# Altium PCB ExperimentBoard.PcbDoc
Units mil, origin at the board's own origin, x right, y up, seen from the top; angles counter-clockwise.
Board outline 3540 x 3540 mil, 4 copper layers (Top Layer, PWR Layer, GND Layer, Bottom Layer), stack 61.811 mil thick; 31 components, 56 nets, 215 pads, 129 vias.
Unrouted connection lines stored in the file: 9.
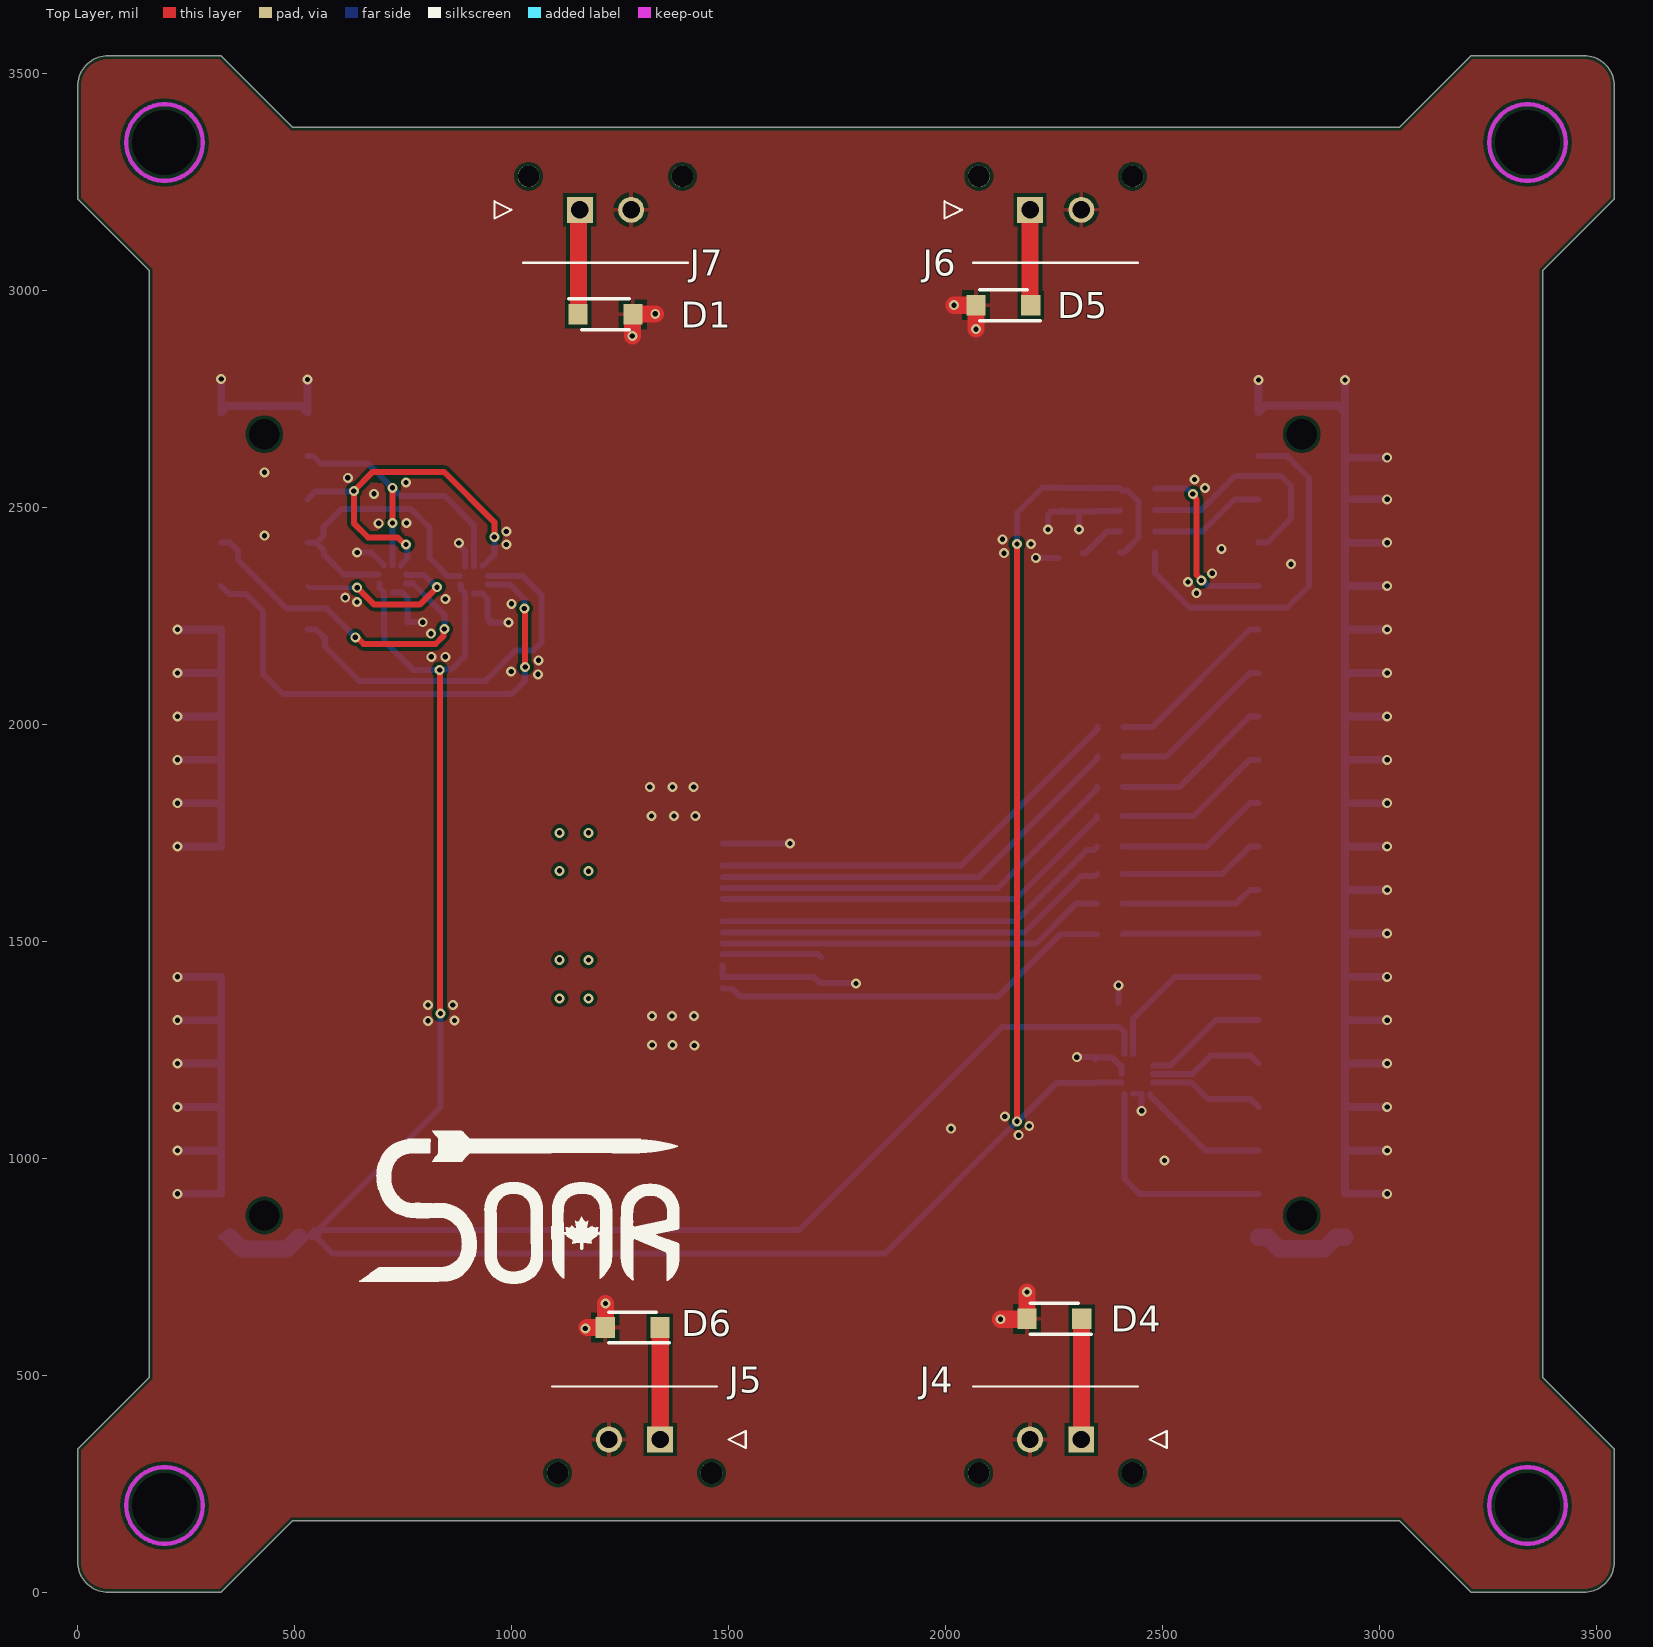
[diagram p0: Top Layer view]
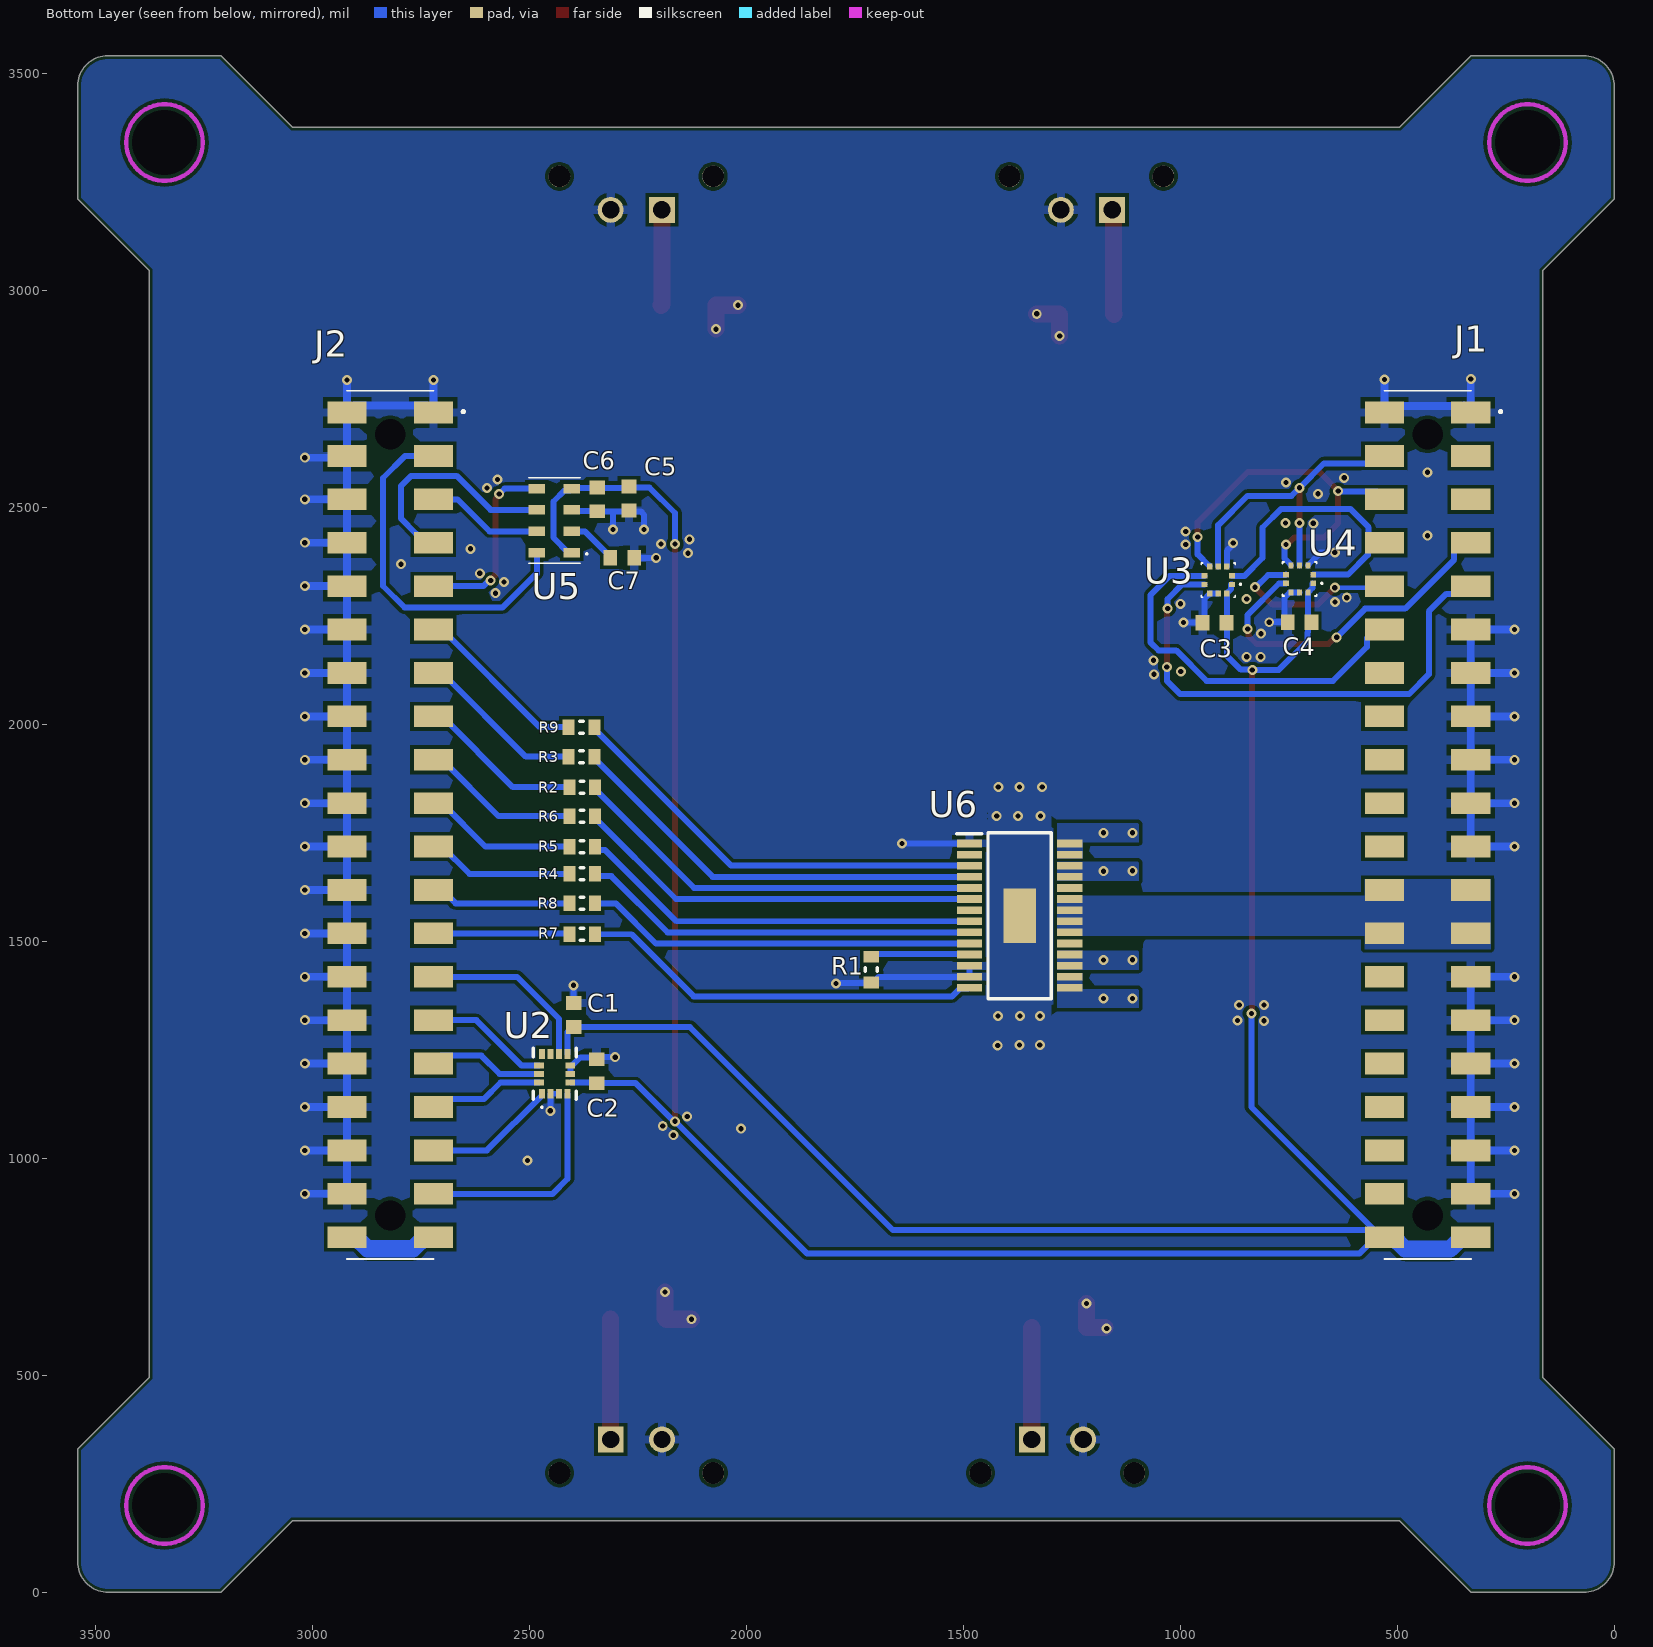
[diagram p1: Bottom Layer view, seen from below]
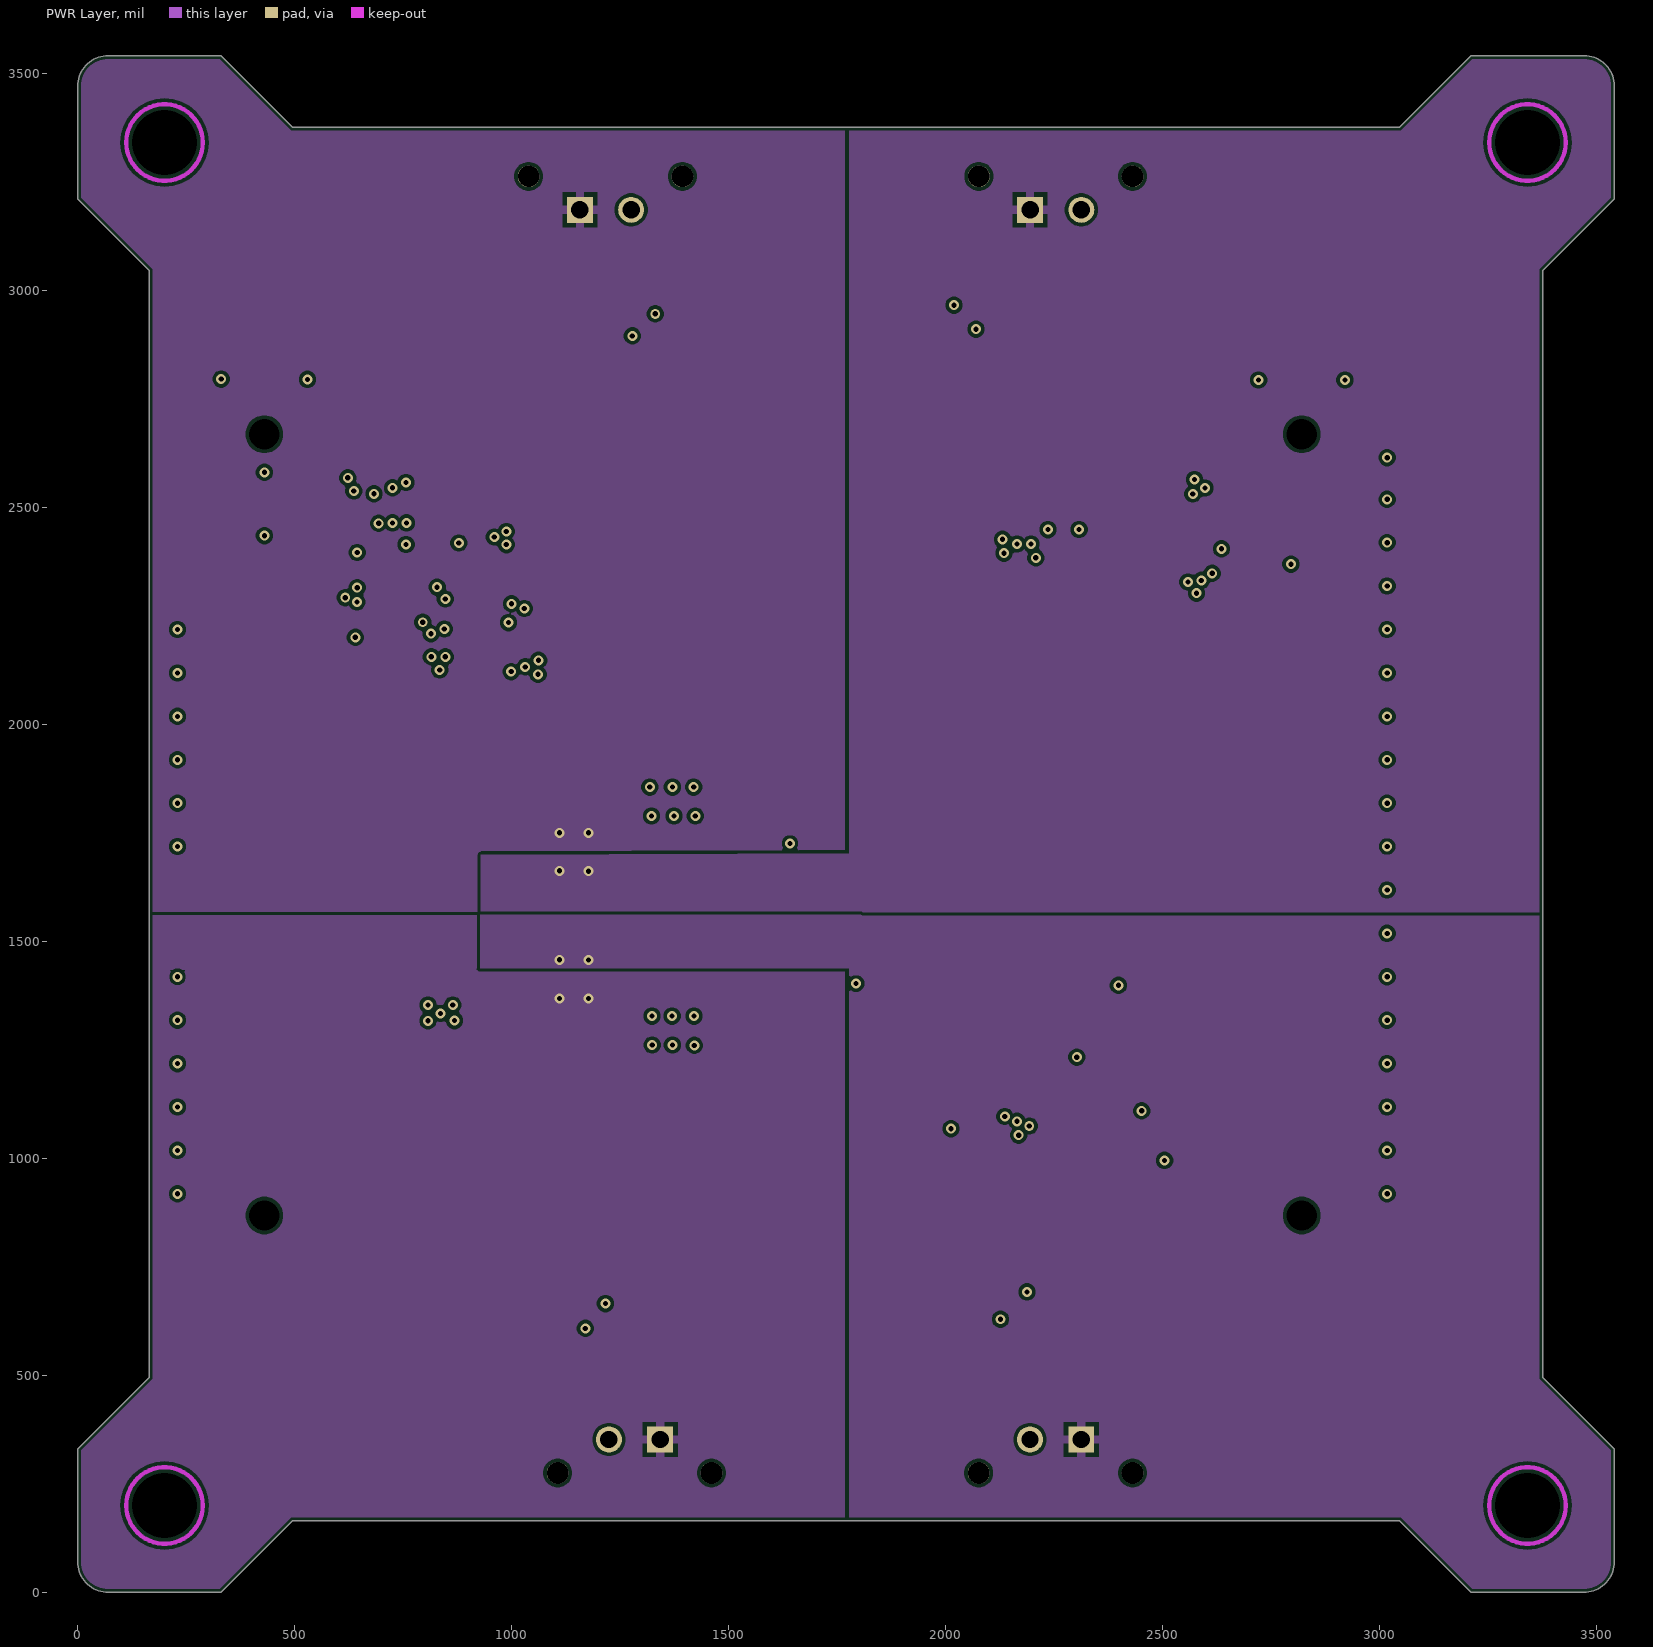
[diagram p2: PWR Layer]
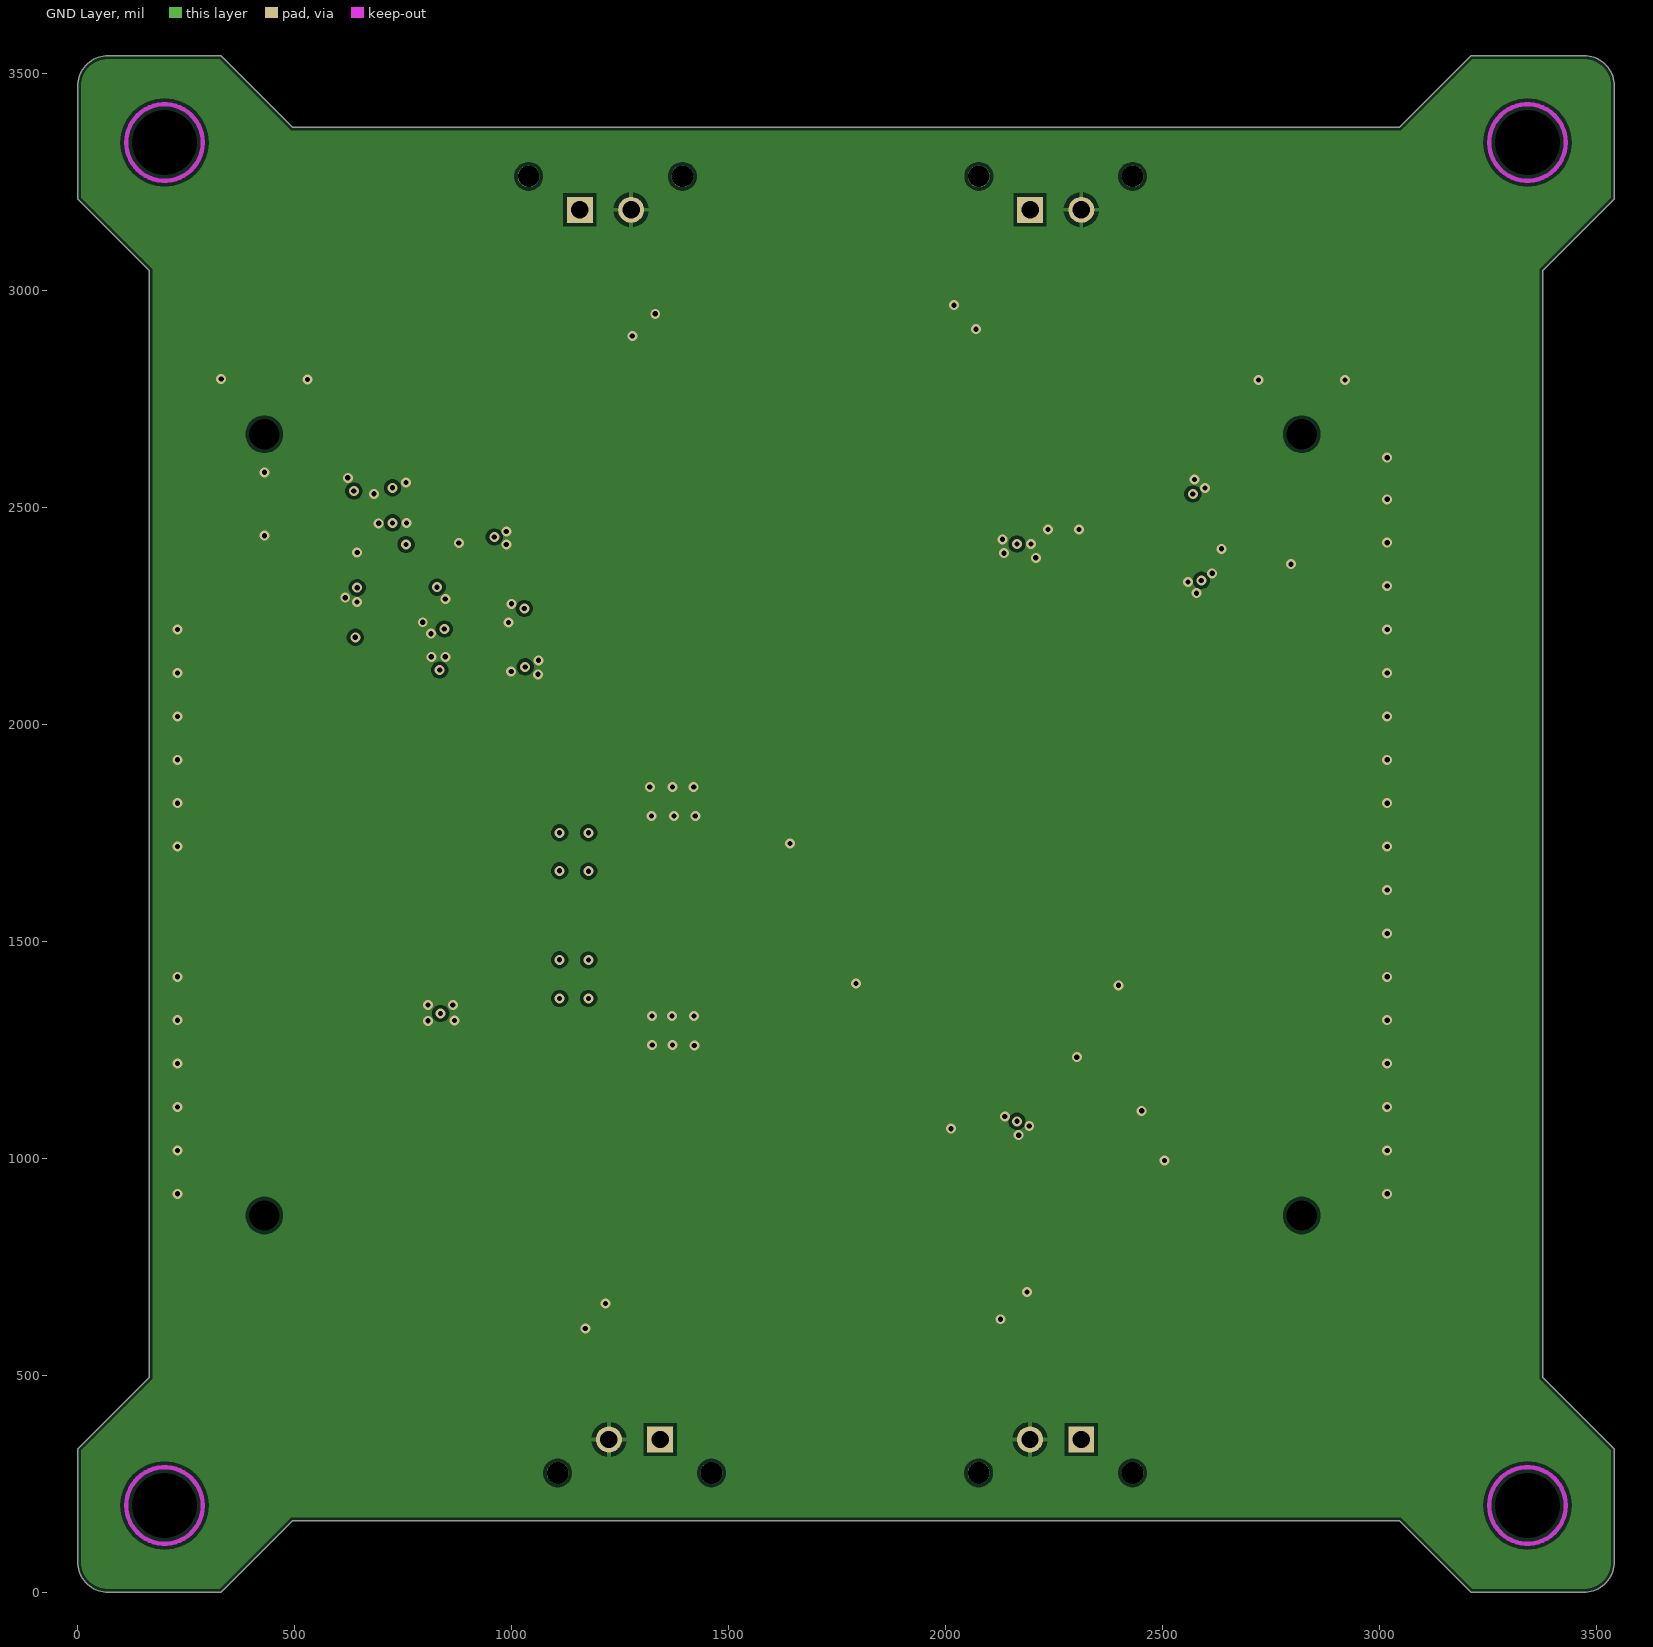
[diagram p3: GND Layer]
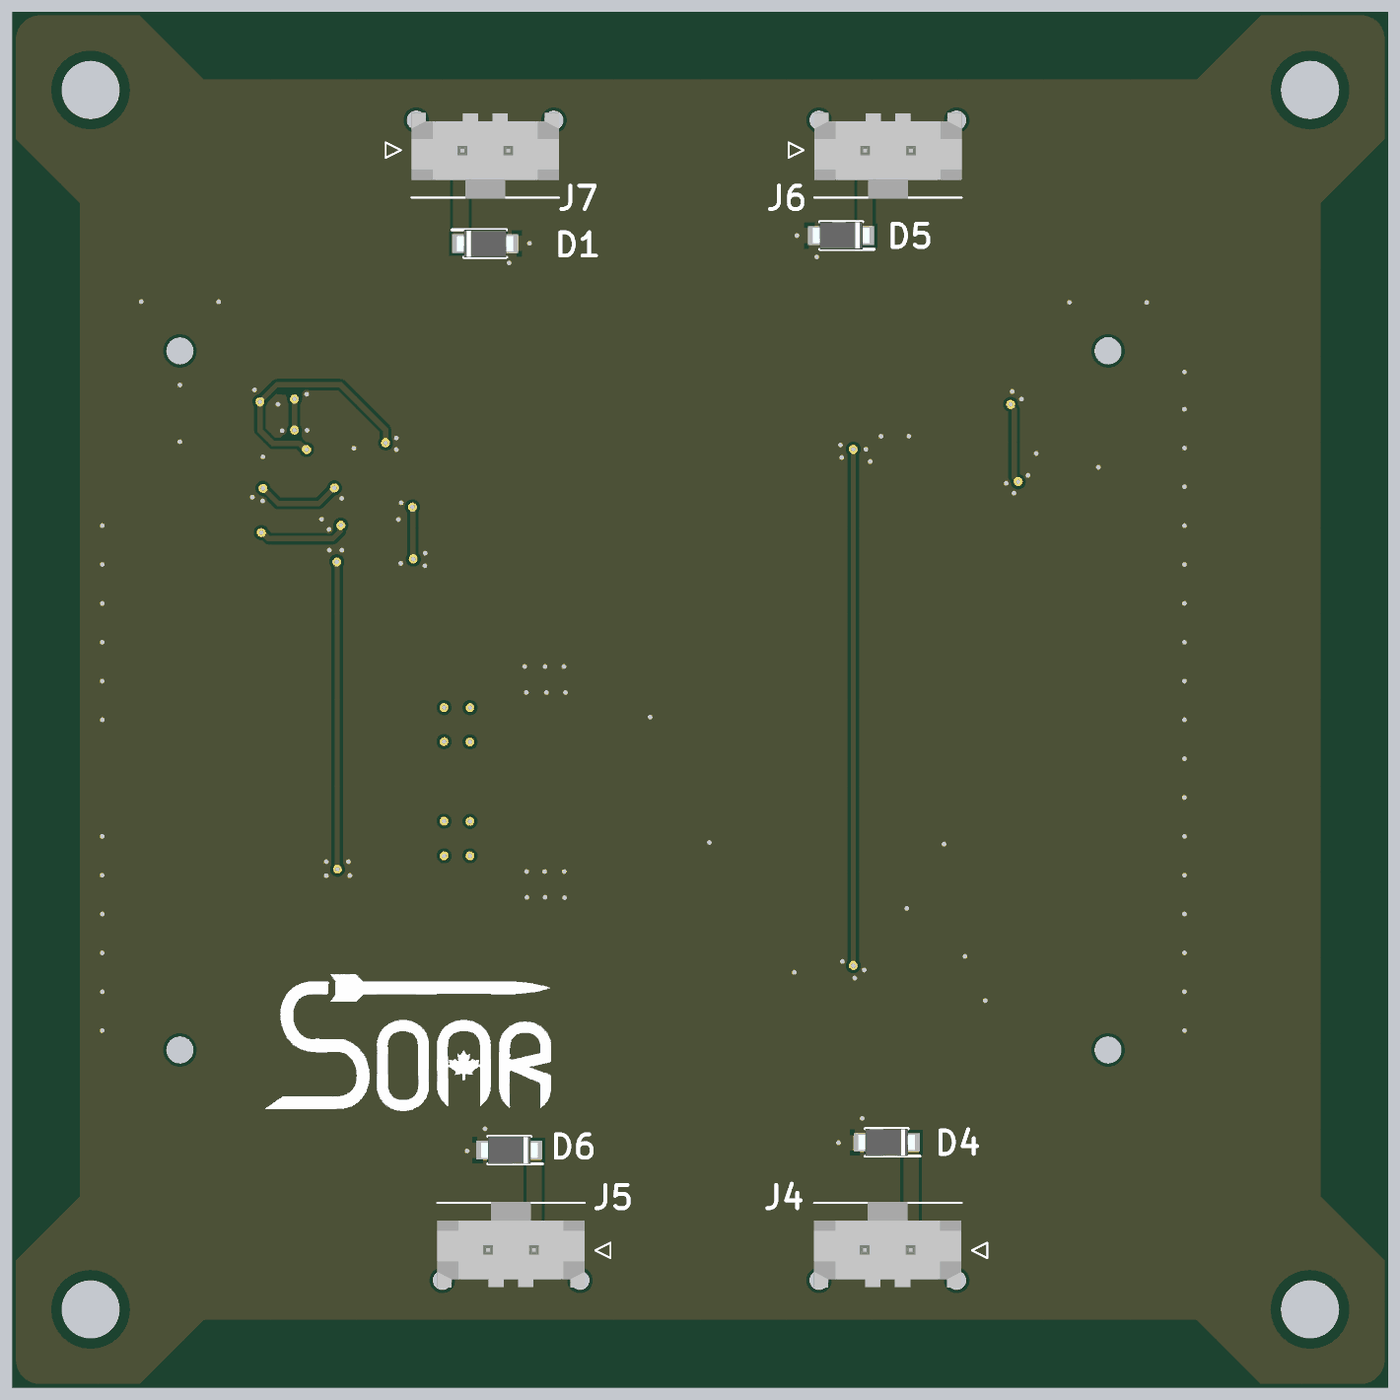
[diagram p4: 3D render of the assembled board from above, using the file's embedded part models]

## Layer stack, top to bottom
Top Mask: solder mask 0.591, Solder Resist, Dk 3.8
Top Layer: signal copper 1.378
Dielectric 1: prepreg 7.874, 7628, Dk 4.6
PWR Layer: signal copper 0.689
Core: core 41.929, FR-4, Dk 4.5
GND Layer: signal copper 0.689
Dielectric 2: prepreg 7.874, 7628, Dk 4.6
Bottom Layer: signal copper 1.378
Bottom Mask: solder mask 0.591, Solder Resist, Dk 3.8

## Board outline
0,3470 cw(c70,3470) 70,3540 330,3540 495,3375 3045,3375 3210,3540 3471,3540 cw(c3471,3471) 3540,3471 3540,3210 3375,3045 3375,495 3540,330 3540,70 cw(c3470,70) 3470,0 3210,0 3045,165 495,165 330,0 70,0 cw(c70,70) 0,70 0,330 165,495 165,3045 0,3210

## Design rules (kind name [scope] priority, off if disabled: settings)
BoardOutlineClearance [All] p1: gap=7.87 ignorepadtopadclearanceinfootprint=FALSE except(15.75: Arc-SplitBarrior Arc-SplitContinuation Track-SplitBarrior Track-SplitContinuation SMDPad-SplitBarrior SMDPad-SplitContinuation THPad-SplitBarrior THPad-SplitContinuation Via-SplitBarrior Via-SplitContinuation Fill-SplitBarrior Fill-SplitContinuation Poly-SplitBarrior Poly-SplitContinuation Region-SplitBarrior Region-SplitContinuation Text-SplitBarrior Text-SplitContinuation)
Clearance [All] p1: gap=7.87 ignorepadtopadclearanceinfootprint=FALSE except(3.5: Arc-Arc Arc-Track Arc-SMDPad Track-Track Track-SMDPad SMDPad-SMDPad; 5: Arc-Via Track-Via SMDPad-Via THPad-Via Via-Via; 10: Arc-Text Track-Text SMDPad-Text THPad-Text Via-Text Fill-Text Poly-Text Region-Text Text-Text)
Clearance "Clearance Bottom Layer" [OnLayer('Bottom Layer')] p2: gap=8 ignorepadtopadclearanceinfootprint=TRUE except(10: Arc-Text Track-Text SMDPad-Text THPad-Text Via-Text Fill-Text Poly-Text Region-Text Text-Text)
Clearance "Clearance Top Layer" [OnLayer('Top Layer')] p3: gap=8 ignorepadtopadclearanceinfootprint=TRUE except(10: Arc-Text Track-Text SMDPad-Text THPad-Text Via-Text Fill-Text Poly-Text Region-Text Text-Text)
HoleSize [All] p1: absolutevalues=TRUE maxlimit=248.03 minlimit=7.87 maxpercent=80.000 minpercent=20.000
MinimumAnnularRing [All] p1: minimumring=3
MinimumSolderMaskSliver [All] p1: minsoldermaskwidth=3.94
PolygonConnect PolygonConnect_21 [All vs IsNamedPolygon('GND')] p1: thpad.connectstyle=Relief thpad.reliefconductorwidth=10 thpad.reliefentries=4 thpad.polygonreliefangle="90 Angle" thpad.airgapwidth=10 smdpad.connectstyle=Relief smdpad.reliefconductorwidth=10 smdpad.reliefentries=4 smdpad.polygonreliefangle="90 Angle" smdpad.airgapwidth=10 via.connectstyle=Direct via.reliefconductorwidth=10 via.reliefentries=4 via.polygonreliefangle="90 Angle" via.airgapwidth=10
PolygonConnect PolygonConnect_20 [All vs IsNamedPolygon('GND_L01_P052')] p2: thpad.connectstyle=Relief thpad.reliefconductorwidth=10 thpad.reliefentries=4 thpad.polygonreliefangle="90 Angle" thpad.airgapwidth=10 smdpad.connectstyle=Relief smdpad.reliefconductorwidth=10 smdpad.reliefentries=4 smdpad.polygonreliefangle="90 Angle" smdpad.airgapwidth=10 via.connectstyle=Direct via.reliefconductorwidth=10 via.reliefentries=4 via.polygonreliefangle="90 Angle" via.airgapwidth=10
PolygonConnect PolygonConnect_19 [All vs IsNamedPolygon('OUT1_L04_P049')] p3: connectstyle=Direct reliefconductorwidth=10 reliefentries=4 polygonreliefangle="90 Angle" airgapwidth=10
PolygonConnect PolygonConnect_18 [All vs IsNamedPolygon('OUT4_L04_P048')] p4: connectstyle=Direct reliefconductorwidth=10 reliefentries=4 polygonreliefangle="90 Angle" airgapwidth=10
PolygonConnect PolygonConnect_17 [All vs IsNamedPolygon('OUT3_L04_P047')] p5: connectstyle=Direct reliefconductorwidth=10 reliefentries=4 polygonreliefangle="90 Angle" airgapwidth=10
PolygonConnect PolygonConnect_16 [All vs IsNamedPolygon('OUT2_L04_P046')] p6: connectstyle=Direct reliefconductorwidth=10 reliefentries=4 polygonreliefangle="90 Angle" airgapwidth=10
PolygonConnect PolygonConnect_15 [All vs IsNamedPolygon('GND_L04_P040')] p7: thpad.connectstyle=Relief thpad.reliefconductorwidth=10 thpad.reliefentries=4 thpad.polygonreliefangle="90 Angle" thpad.airgapwidth=10 smdpad.connectstyle=Direct smdpad.reliefconductorwidth=10 smdpad.reliefentries=4 smdpad.polygonreliefangle="90 Angle" smdpad.airgapwidth=10 via.connectstyle=Direct via.reliefconductorwidth=10 via.reliefentries=4 via.polygonreliefangle="90 Angle" via.airgapwidth=10
PolygonConnect PolygonConnect_14 [All vs IsNamedPolygon('GND_L04_P040')] p8: thpad.connectstyle=Relief thpad.reliefconductorwidth=10 thpad.reliefentries=4 thpad.polygonreliefangle="90 Angle" thpad.airgapwidth=10 smdpad.connectstyle=Direct smdpad.reliefconductorwidth=10 smdpad.reliefentries=4 smdpad.polygonreliefangle="90 Angle" smdpad.airgapwidth=10 via.connectstyle=Relief via.reliefconductorwidth=10 via.reliefentries=4 via.polygonreliefangle="90 Angle" via.airgapwidth=10
PolygonConnect PolygonConnect_13 [All vs IsNamedPolygon('OUT4_L04_P044')] p9: thpad.connectstyle=Relief thpad.reliefconductorwidth=10 thpad.reliefentries=4 thpad.polygonreliefangle="90 Angle" thpad.airgapwidth=10 smdpad.connectstyle=Direct smdpad.reliefconductorwidth=10 smdpad.reliefentries=4 smdpad.polygonreliefangle="90 Angle" smdpad.airgapwidth=10 via.connectstyle=Relief via.reliefconductorwidth=10 via.reliefentries=4 via.polygonreliefangle="90 Angle" via.airgapwidth=10
PolygonConnect PolygonConnect_12 [All vs IsNamedPolygon('OUT3_L04_P043')] p10: thpad.connectstyle=Relief thpad.reliefconductorwidth=10 thpad.reliefentries=4 thpad.polygonreliefangle="90 Angle" thpad.airgapwidth=10 smdpad.connectstyle=Direct smdpad.reliefconductorwidth=10 smdpad.reliefentries=4 smdpad.polygonreliefangle="90 Angle" smdpad.airgapwidth=10 via.connectstyle=Relief via.reliefconductorwidth=10 via.reliefentries=4 via.polygonreliefangle="90 Angle" via.airgapwidth=10
PolygonConnect PolygonConnect_11 [All vs IsNamedPolygon('OUT2_L04_P042')] p11: thpad.connectstyle=Relief thpad.reliefconductorwidth=10 thpad.reliefentries=4 thpad.polygonreliefangle="90 Angle" thpad.airgapwidth=10 smdpad.connectstyle=Direct smdpad.reliefconductorwidth=10 smdpad.reliefentries=4 smdpad.polygonreliefangle="90 Angle" smdpad.airgapwidth=10 via.connectstyle=Relief via.reliefconductorwidth=10 via.reliefentries=4 via.polygonreliefangle="90 Angle" via.airgapwidth=10
PolygonConnect PolygonConnect_10 [All vs IsNamedPolygon('OUT2_L04_P042')] p12: thpad.connectstyle=Relief thpad.reliefconductorwidth=10 thpad.reliefentries=4 thpad.polygonreliefangle="90 Angle" thpad.airgapwidth=10 smdpad.connectstyle=Direct smdpad.reliefconductorwidth=10 smdpad.reliefentries=4 smdpad.polygonreliefangle="90 Angle" smdpad.airgapwidth=10 via.connectstyle=Relief via.reliefconductorwidth=10 via.reliefentries=4 via.polygonreliefangle="90 Angle" via.airgapwidth=10
PolygonConnect PolygonConnect_9 [All vs IsNamedPolygon('OUT1_L04_P041')] p13: thpad.connectstyle=Relief thpad.reliefconductorwidth=10 thpad.reliefentries=4 thpad.polygonreliefangle="90 Angle" thpad.airgapwidth=10 smdpad.connectstyle=Direct smdpad.reliefconductorwidth=10 smdpad.reliefentries=4 smdpad.polygonreliefangle="90 Angle" smdpad.airgapwidth=10 via.connectstyle=Relief via.reliefconductorwidth=10 via.reliefentries=4 via.polygonreliefangle="90 Angle" via.airgapwidth=10
PolygonConnect PolygonConnect_8 [All vs IsNamedPolygon('GND_L04_P040')] p14: thpad.connectstyle=Relief thpad.reliefconductorwidth=10 thpad.reliefentries=4 thpad.polygonreliefangle="90 Angle" thpad.airgapwidth=10 smdpad.connectstyle=Direct smdpad.reliefconductorwidth=10 smdpad.reliefentries=4 smdpad.polygonreliefangle="90 Angle" smdpad.airgapwidth=10 via.connectstyle=Direct via.reliefconductorwidth=10 via.reliefentries=4 via.polygonreliefangle="90 Angle" via.airgapwidth=10
PolygonConnect PolygonConnect_7 [All vs IsNamedPolygon('GND_L04_P040')] p15: thpad.connectstyle=Relief thpad.reliefconductorwidth=10 thpad.reliefentries=4 thpad.polygonreliefangle="90 Angle" thpad.airgapwidth=10 smdpad.connectstyle=Relief smdpad.reliefconductorwidth=10 smdpad.reliefentries=4 smdpad.polygonreliefangle="90 Angle" smdpad.airgapwidth=10 via.connectstyle=Direct via.reliefconductorwidth=10 via.reliefentries=4 via.polygonreliefangle="90 Angle" via.airgapwidth=10
PolygonConnect PolygonConnect_6 [All vs IsNamedPolygon('GND_L04_P040')] p16: thpad.connectstyle=Direct thpad.reliefconductorwidth=10 thpad.reliefentries=4 thpad.polygonreliefangle="90 Angle" thpad.airgapwidth=10 smdpad.connectstyle=Direct smdpad.reliefconductorwidth=10 smdpad.reliefentries=4 smdpad.polygonreliefangle="90 Angle" smdpad.airgapwidth=10 via.connectstyle=Relief via.reliefconductorwidth=10 via.reliefentries=4 via.polygonreliefangle="90 Angle" via.airgapwidth=10
PolygonConnect PolygonConnect_5 [All vs IsNamedPolygon('GND')] p17: thpad.connectstyle=Direct thpad.reliefconductorwidth=10 thpad.reliefentries=4 thpad.polygonreliefangle="90 Angle" thpad.airgapwidth=10 smdpad.connectstyle=Direct smdpad.reliefconductorwidth=10 smdpad.reliefentries=4 smdpad.polygonreliefangle="90 Angle" smdpad.airgapwidth=10 via.connectstyle=Relief via.reliefconductorwidth=10 via.reliefentries=4 via.polygonreliefangle="90 Angle" via.airgapwidth=10
PolygonConnect PolygonConnect_4 [All vs IsNamedPolygon('GND')] p18: thpad.connectstyle=Direct thpad.reliefconductorwidth=10 thpad.reliefentries=4 thpad.polygonreliefangle="90 Angle" thpad.airgapwidth=10 smdpad.connectstyle=Direct smdpad.reliefconductorwidth=10 smdpad.reliefentries=4 smdpad.polygonreliefangle="90 Angle" smdpad.airgapwidth=10 via.connectstyle=Relief via.reliefconductorwidth=10 via.reliefentries=4 via.polygonreliefangle="90 Angle" via.airgapwidth=10
PolygonConnect PolygonConnect_3 [All vs IsNamedPolygon('12V1_L04_P039')] p19: thpad.connectstyle=Direct thpad.reliefconductorwidth=10 thpad.reliefentries=4 thpad.polygonreliefangle="90 Angle" thpad.airgapwidth=10 smdpad.connectstyle=Direct smdpad.reliefconductorwidth=10 smdpad.reliefentries=4 smdpad.polygonreliefangle="90 Angle" smdpad.airgapwidth=10 via.connectstyle=Relief via.reliefconductorwidth=10 via.reliefentries=4 via.polygonreliefangle="90 Angle" via.airgapwidth=10
PolygonConnect PolygonConnect_2 [All vs IsNamedPolygon('NONET_L04_P039')] p20: thpad.connectstyle=Relief thpad.reliefconductorwidth=10 thpad.reliefentries=4 thpad.polygonreliefangle="90 Angle" thpad.airgapwidth=10 smdpad.connectstyle=Direct smdpad.reliefconductorwidth=10 smdpad.reliefentries=4 smdpad.polygonreliefangle="90 Angle" smdpad.airgapwidth=10 via.connectstyle=Relief via.reliefconductorwidth=10 via.reliefentries=4 via.polygonreliefangle="90 Angle" via.airgapwidth=10
PolygonConnect [All vs IsNamedPolygon('NONET_L04_P034')] p21: thpad.connectstyle=Relief thpad.reliefconductorwidth=10 thpad.reliefentries=4 thpad.polygonreliefangle="90 Angle" thpad.airgapwidth=10 smdpad.connectstyle=Direct smdpad.reliefconductorwidth=10 smdpad.reliefentries=4 smdpad.polygonreliefangle="90 Angle" smdpad.airgapwidth=10 via.connectstyle=Relief via.reliefconductorwidth=10 via.reliefentries=4 via.polygonreliefangle="90 Angle" via.airgapwidth=10
PolygonConnect PolygonConnect_1 [All] p22: thpad.connectstyle=Relief thpad.reliefconductorwidth=20 thpad.reliefentries=4 thpad.polygonreliefangle="90 Angle" thpad.airgapwidth=10 smdpad.connectstyle=Relief smdpad.reliefconductorwidth=20 smdpad.reliefentries=4 smdpad.polygonreliefangle="90 Angle" smdpad.airgapwidth=10 via.connectstyle=Relief via.reliefconductorwidth=10 via.reliefentries=4 via.polygonreliefangle="90 Angle" via.airgapwidth=10
RoutingCorners [All] p1: cornerstyle=Round minsetback=100 maxsetback=100
RoutingVias [All] p1: holewidth=19.68 width=39.37 viastyle="Through Hole" minholewidth=7.87 minwidth=17.72 maxholewidth=39.37 maxwidth=78.74
SilkToSilkClearance [All] p1: silktosilkclearance=3.94
SilkToSolderMaskClearance [IsPad] p1: minsilkscreentomaskgap=3.94 clearancetoexposedcopper=TRUE
SolderMaskExpansion [IsVia And InNetClass('GND_Class')] p1: expansion=0 istentingtop=TRUE
SolderMaskExpansion SolderMaskExpansionGlobal [All] p2: expansion=0.9 istentingtop=FALSE
SupplyNets "Schematic Supply Nets_4" [InNet('5V')] p1: voltage=0.000
SupplyNets "Schematic Supply Nets_3" [InNet('GND')] p2: voltage=0.000
SupplyNets "Schematic Supply Nets_2" [InNet('12V1')] p3: voltage=0.000
SupplyNets "Schematic Supply Nets_1" [InNet('3V3')] p4: voltage=0.000
Width [All] p1: maxlimit=100 minlimit=3.5 preferedwidth=10 minimp=50.000000 maximp=50.000000 favimp=50.000000
25 further rules are at their usual default settings.

## Classes and differential pairs
net class GND_Class: GND
polygon class Top_GND: GND

## Components (designator, comment, footprint, x,y, rotation, side; value= is the part's Value field where it differs from the comment)
C1 "0.1uF" 1608[0603] 2397.56,1330 r270 bottom
C2 "0.1uF" 1608[0603] 2344.25,1200.36 r270 bottom
C3 "0.1uF" 1608[0603] 921,2234 r180 bottom
C4 "0.1uF" 1608[0603] 725.02,2234.81 r180 bottom
C5 "0.1uF" 1608[0603] 2270,2520 r270 bottom
C6 "10uF" 1608[0603] 2342.91,2517.83 r270 bottom value=0.1uF
C7 "0.1uF" 1608[0603] 2285.2,2383.22 r180 bottom
D1 "SL1J" SODFL3718X130N 1215.87,2944.35 r0 top
D4 "SL1J" SODFL3718X130N 2250,630 r180 top
D5 "SL1J" SODFL3718X130N 2132.7,2965.18 r180 top
D6 "SL1J" SODFL3718X130N 1278.36,610 r180 top
J1 "HLE-120-02-L-DV-A" HLE-120-02-XXX-DV-A 430,1768 r90 bottom
J2 "HLE-120-02-L-DV-A" HLE-120-02-XXX-DV-A 2820,1768 r90 bottom
J4 "43650-0216" 43650-02YY_151617 2312,352 r0 top
J5 "43650-0216" 43650-02YY_151617 1342,352 r0 top
J6 "43650-0216" 43650-02YY_151617 2194,3185 r180 top
J7 "43650-0216" 43650-02YY_151617 1156.89,3185 r180 top (schematic designator J9)
R1 "800" J1-0603 1711.89,1434.59 r270 bottom value=1K
R2 "4.7k" J1-0603 2378,1855 r0 bottom value=1K
R3 "4.7k" J1-0603 2379.47,1925 r0 bottom value=1K
R4 "4.7k" J1-0603 2378,1655 r0 bottom value=1K
R5 "4.7k" J1-0603 2378,1718 r0 bottom value=1K
R6 "4.7k" J1-0603 2378,1788 r0 bottom value=1K
R7 "4.7k" J1-0603 2378,1516 r0 bottom value=1K
R8 "4.7k" J1-0603 2378,1587 r0 bottom value=1K
R9 "4.7k" J1-0603 2379.47,1993 r0 bottom value=1K
U2 "LSM6DSO32TR" LSM6DSO 2441.06,1194.32 r90 bottom
U3 "LPS22HHTR" LPS22HHTR 912.41,2332.03 r0 bottom
U4 "LPS22HHTR" LPS22HHTR 725.02,2334.42 r0 bottom
U5 "MPL3115A2ST1" MPL3115A2R1 2442,2469 r0 bottom
U6 "TPS4H160AQPWPRQ1" SOP65P640X120-28N 1370,1558.75 r180 bottom

## Footprints (in the part's own frame and the unit in brackets; to place one, negate y for a bottom-side part, rotate by r counter-clockwise, add the part's x,y. Pads: shape width x height; smd on the part's side, far side on the other; paste and mask are expansions set on the pad)
1608[0603] [mm]
  rect 0.8x0.9 smd: 1(-0.7,0) 2(0.7,0)
  body extent -0.87,-0.48 0.87,0.48, height 1.3
43650-02YY_151617 [mm]
  rect 1.52x1.52 hole 1.02: 1(0,0)
  round 1.52 hole 1.02: 2(-3,0)
  round 1.27 hole 1.27 unplated: 3(3,-1.96) 4(-6,-1.96)
  silkscreen extent -6.32,-0.5 5,3.1, body extent -6.33,-2.44 3.31,3.17, height 9.77
HLE-120-02-XXX-DV-A [mm]
  rect 1.27x2.29 smd: 1(24.13,-2.525) 2(24.13,2.525) 3(21.59,-2.525) 4(21.59,2.525) 5(19.05,-2.525) 6(19.05,2.525) 7(16.51,-2.525) 8(16.51,2.525) 9(13.97,-2.525) 10(13.97,2.525) 11(11.43,-2.525) 12(11.43,2.525) 13(8.89,-2.525) 14(8.89,2.525) 15(6.35,-2.525) 16(6.35,2.525) 17(3.81,-2.525) 18(3.81,2.525) 19(1.27,-2.525) 20(1.27,2.525) 21(-1.27,-2.525) 22(-1.27,2.525) 23(-3.81,-2.525) 24(-3.81,2.525) 25(-6.35,-2.525) 26(-6.35,2.525) 27(-8.89,-2.525) 28(-8.89,2.525) 29(-11.43,-2.525) 30(-11.43,2.525) 31(-13.97,-2.525) 32(-13.97,2.525) 33(-16.51,-2.525) 34(-16.51,2.525) 35(-19.05,-2.525) 36(-19.05,2.525) 37(-21.59,-2.525) 38(-21.59,2.525) 39(-24.13,-2.525) 40(-24.13,2.525)
  round 0.89 hole 1.78 unplated: 41(22.86,0) 42(-22.86,0)
  silkscreen extent -25.4,-4.32 25.4,2.54
J1-0603 [mm] "Chip Resistor, Body 1.6x0.8mm, IPC High Density"
  rect 0.7x0.9 smd: 1(-0.75,0) 2(0.75,0)
  silkscreen extent -0.1,-0.35 0.1,0.35, body extent -0.85,-0.48 0.85,0.48, height 0.9
LPS22HHTR [mm]
  rect 0.35x0.3 smd: 1(-0.8,0.25) 2(-0.8,-0.25) 6(0.8,-0.25) 7(0.8,0.25)
  rect 0.3x0.35 smd: 3(-0.5,-0.8) 4(0,-0.8) 5(0.5,-0.8) 8(0.5,0.8) 9(0,0.8) 10(-0.5,0.8)
  silkscreen extent -1.35,-1 1,1, body extent -1,-1 1,1, height 0.8
LSM6DSO [mm]
  rect 0.575x0.35 smd: 1(-1.163,0.75) 2(-1.163,0.25) 3(-1.163,-0.25) 4(-1.163,-0.75) 8(1.163,-0.75) 9(1.163,-0.25) 10(1.163,0.25) 11(1.163,0.75)
  rect 0.35x0.575 smd: 5(-0.5,-0.913) 6(0,-0.913) 7(0.5,-0.913) 12(0.5,0.913) 13(0,0.913) 14(-0.5,0.913)
  silkscreen extent -2,-1.25 1.5,1.25, body extent -1.55,-1.3 1.55,1.3, height 0.87
MPL3115A2R1 [mm]
  rect 0.95x0.55 smd: 1(-1.025,1.875) 2(-1.025,0.625) 3(-1.025,-0.625) 4(-1.025,-1.875) 5(1.025,-1.875) 6(1.025,-0.625) 7(1.025,0.625) 8(1.025,1.875)
  silkscreen extent -1.95,-2.5 1.5,2.5, body extent -1.5,-2.5 1.5,2.5, height 1.3
SODFL3718X130N [mm]
  rect 1.12x1.22 smd: 1(-1.6,0) 2(1.6,0)
  silkscreen extent -2.16,-0.9 1.4,0.9, body extent -1.85,-0.9 1.85,0.9, height 1.3
SOP65P640X120-28N [mm]
  rect 1.475x0.45 smd: 1(-2.938,4.225) 2(-2.938,3.575) 3(-2.938,2.925) 4(-2.938,2.275) 5(-2.938,1.625) 6(-2.938,0.975) 7(-2.938,0.325) 8(-2.938,-0.325) 9(-2.938,-0.975) 10(-2.938,-1.625) 11(-2.938,-2.275) 12(-2.938,-2.925) 13(-2.938,-3.575) 14(-2.938,-4.225) 15(2.938,-4.225) 16(2.938,-3.575) 17(2.938,-2.925) 18(2.938,-2.275) 19(2.938,-1.625) 20(2.938,-0.975) 21(2.938,-0.325) 22(2.938,0.325) 23(2.938,0.975) 24(2.938,1.625) 25(2.938,2.275) 26(2.938,2.925) 27(2.938,3.575) 28(2.938,4.225)
  rect 1.9x3.2 smd: 29(0,0)
  silkscreen extent -3.67,-4.85 1.85,4.85, body extent -3.2,-4.85 3.2,4.85, height 1.13

## Part data
C1 C2 C3 C4 C5 C6 C7: library part Cap, "Capacitor", Published=8-Jun-2000, PackageReference=RAD-0.3, PackageDescription="Radial Cap, Thru-Hole; 2 Leads; 0.3 in Pin Spacing", LatestRevisionDate=17-Jul-2002, Publisher="Altium Limited", LatestRevisionNote="Re-released for DXP Platform."
D1 D4 D5 D6: "Diode", Manufacturer_Name=Diotec, Mouser Part Number=637-SL1J, Manufacturer_Part_Number=SL1J, Height=1.3mm, Datasheet Link=https://diotec.com/request/datasheet/sl1a.pdf, Mouser Price/Stock=https://www.mouser.co.uk/ProductDetail/Diotec-Semiconductor/SL1J?qs=OlC7AqGiEDm%2FUyNJqMVviA%3D%3D, Arrow Part Number=SL1J, Arrow Price/Stock=https://www.arrow.com/en/products/sl1j/diotec-semiconductor-ag?region=europe
J1 J2: "Connector", Manufacturer_Name=SAMTEC, Mouser Part Number=200-HLE12002LDVA, Arrow Part Number=HLE-120-02-L-DV-A, Arrow Price/Stock=https://www.arrow.com/en/products/hle-120-02-l-dv-a/samtec?region=nac, Datasheet Link=http://suddendocs.samtec.com/prints/hle-1xx-02-xxx-dv-xx-xx-xx-mkt.pdf, Manufacturer_Part_Number=HLE-120-02-L-DV-A, Mouser Price/Stock=https://www.mouser.co.uk/ProductDetail/Samtec/HLE-120-02-L-DV-A?qs=0lQeLiL1qyZq0rwGrAI%2FeQ%3D%3D
J4 J5 J6 J7: "Connector", Manufacturer_Name=Molex, Mouser Part Number=538-43650-0216, Datasheet Link=https://www.molex.com/pdm_docs/sd/436500215_sd.pdf, Height=9.9mm, Manufacturer_Part_Number=43650-0216, Mouser Price/Stock=https://www.mouser.co.uk/ProductDetail/Molex/43650-0216?qs=EeaHXY5iaaOSmxGRwEX9Ng%3D%3D
R1 R2 R3 R4 R5 R6 R7 R8 R9: library part Res3, "Resistor", LatestRevisionDate=29-May-2009, LatestRevisionNote="IPC-7351 Footprint Added.", PackageDescription="Chip Resistor", PackageReference=J1-0603, Published=8-Jun-2000, Publisher="Altium Limited"
U2: library part LSM6DSO, "Accelerometer", Manufacturer_Name=STMicroelectronics, Mouser Part Number=N/A, Datasheet Link=https://www.st.com/en/mems-and-sensors/lsm6dso.html, Height=0.86mm, Manufacturer_Part_Number=LSM6DSO, Mouser Price/Stock=https://www.mouser.co.uk/ProductDetail/STMicroelectronics/LSM6DSO?qs=lc2O%252BfHJPVaWmEJZZeO%252B0w%3D%3D
U3 U4: "Integrated Circuit", Manufacturer_Name=STMicroelectronics, Mouser Part Number=511-LPS22HHTR, Arrow Part Number=LPS22HHTR, Arrow Price/Stock=https://www.arrow.com/en/products/lps22hhtr/stmicroelectronics?region=europe, Datasheet Link=https://www.st.com/resource/en/datasheet/lps22hh.pdf, Height=0.8mm, Manufacturer_Part_Number=LPS22HHTR, Mouser Price/Stock=https://www.mouser.co.uk/ProductDetail/STMicroelectronics/LPS22HHTR?qs=lc2O%252BfHJPVbKAkJQGWFcLg%3D%3D
U5: library part MPL3115A2R1, "Integrated Circuit", Manufacturer_Name=NXP, Mouser Part Number=841-MPL3115A2R1, Arrow Part Number=MPL3115A2R1, Arrow Price/Stock=https://www.arrow.com/en/products/mpl3115a2r1/nxp-semiconductors?region=nac, Datasheet Link=http://www.nxp.com/docs/en/data-sheet/MPL3115A2.pdf, Height=1.2mm, Manufacturer_Part_Number=MPL3115A2R1, Mouser Price/Stock=https://www.mouser.co.uk/ProductDetail/NXP-Semiconductors/MPL3115A2R1?qs=6ddF3R%2F6EV%2Fx8daKoNGetQ%3D%3D
U6: "Switch", Manufacturer_Name="Texas Instruments", Mouser Part Number=595-TPS4H160AQPWPRQ1, Arrow Part Number=TPS4H160AQPWPRQ1, Arrow Price/Stock=https://www.arrow.com/en/products/tps4h160aqpwprq1/texas-instruments?region=nac, Datasheet Link=http://www.ti.com/lit/gpn/tps4h160-q1, Height=1.2mm, Manufacturer_Part_Number=TPS4H160AQPWPRQ1, Mouser Price/Stock=https://www.mouser.co.uk/ProductDetail/Texas-Instruments/TPS4H160AQPWPRQ1?qs=l4JqiU1WKg3jmTHCrG9xTw%3D%3D

## Free pads (board coordinates)
  round 60 hole 150 unplated mask+10: 2(200,200) 2(200,3340) 2(3340,200) 2(3340,3340)

## Via types
v1: diameter 23, hole 12, Top Layer to Bottom Layer, tented both sides, 104 vias
v2: diameter 23, hole 12, Top Layer to Bottom Layer, 25 vias

## Nets (pads, with @x,y where several pads share a name; then routed paths per layer and width w, separated by ;. In a path a pad name is that pad's centre, name@x,y a point inside that pad or via, vN(x,y) a via of type N, cw(c..) or ccw(c..) an arc to the next point about the centre after c; other vN are vias at no path point)
3V3: C1.2 C2.2 C3.2 C4.2 C5.1 C6.1 J1.39 J1.40 U2.5 U2.8 U3.1 U3.10 U4.1 U4.10 U5.1 U5.4 | length 8215.9
  Top Layer w10: v2(834,2125) v2@835,2124 ; v2@835,1334.45 v2(836,1333.45)
  Top Layer w13.78: v2@835,1334.45 v2@835,2124 ; v2(2164,1085) 2164,2364.52 v2(2164,2415)
  Bottom Layer w13.78: J1.39 J1.39@350.67,818 ; J1.40@509.33,818 J1.40 ; J1.40@529.61,818 J1.40@545.89,834.28 ; J1.40@536.02,818 J1.40@549.49,818 ; J1.40@545.79,834.38 1661.59,834.38 2129.65,1302.44 C1.2 2399.53,1302.44 2411.53,1290.44 U2.8 ; U4.1@695.41,2323.68 695.41,2313.83 U4.10@705.33,2303.91 ; 705.33,2211.91 U4.10@705.33,2301.94 ; 706.63,2211.11 706.86,2210.88 706.86,2191.14 773,2125 v2(834,2125) 834.78,2125.78 860.5,2125.78 892.47,2157.75 892.47,2218.33 892.72,2218.58 892.72,2223.17 C3.2@893.19,2233.75 ; v2(836,1333.45) 836,1117.98 554.8,836.79 554.8,823.31 J1.40@549.49,818 ; U3.1 881.89,2322.18 882.8,2321.28 882.8,2311.43 U3.10@892.72,2301.51 ; C3.2@892.72,2229.4 U3.10@892.72,2299.55 ; v2(2164,2415) 2164,2486.42 2222.65,2545.07 C5.1@2267.51,2545.07 ; C5.1@2273.37,2544.19 C6.1@2341.71,2544.19 ; C6.1 C6.1@2345.47,2542.82 ; C6.1@2344.1,2544.19 U5.4@2400.27,2544.19 ; C2.2 2254.77,1172.8 2166.97,1085 v2(2164,1085) 1860,781 586.49,781 J1.40@549.49,818 ; C2.2@2346.08,1174.63 U2.5 ; U5.1 2409.52,2395.18 2444,2429.66 2444,2513 2418.12,2538.88 2405.58,2538.88 U5.4
  Bottom Layer w39.37: J1.39@350.67,818 378.13,790.54 481.87,790.54 J1.40@509.33,818
5V: J2.39 J2.40 | length 220.9
  Bottom Layer w39.37: J2.39 2740.67,818 2767.32,791.35 2872.68,791.35 2899.33,818 J2.40
12V1: J1.23 J1.24 J1.25 J1.26 U6.20 U6.21 U6.22 U6.23
GND: C1.1 C2.1 C3.1 C4.1 C5.2 C6.2 C7.2 D1.2 D4.2 D5.2 D6.2 J1.1 J1.2 J1.11 J1.13 J1.15 J1.17 J1.19 J1.21 J1.27 J1.29 J1.31 J1.33 J1.35 J1.37 J2.1 J2.2 J2.4 J2.6 J2.8 J2.10 J2.12 J2.14 J2.16 J2.18 J2.20 J2.22 J2.24 J2.26 J2.28 J2.30 J2.32 J2.34 J2.36 J2.38 J4.2 J5.2 J6.2 J7.2 R1.2 U2.2 U2.3 U2.6 U2.7 U3.3 U3.8 U3.9 U4.3 U4.8 U4.9 U5.3 U6.1 U6.12 U6.13 U6.29 | length 8354.8
  Top Layer w12: D1.2 1280.93,2942.28 D1.2@1284.96,2942.28
  Top Layer w18: v1(1169.5,608) 1170.86,608 v1@1172.86,610
  Top Layer w39.37: v1@1172.86,610 D6.2 1215.67,610.31 v1(1215.67,665) ; v1(1277.78,2894.6) 1277.78,2943.27 D1.2 ; D1.2@1284.96,2942.28 1288,2945.32 v1(1330.53,2945.32) ; v1(2019,2965.18) D5.2 v1(2069.7,2910) ; v1(2126,629) 2184.01,629 2187,631.99 v1(2187,692)
  Bottom Layer w10: J2.10 J2.10@2919.76,2318.35 ; J2.4 J2.4@2923.57,2613.84
  Bottom Layer w13.78: v1(643.81,2395.29) 676.94,2395.29 704.43,2367.81 704.43,2366.83 U4.3 ; U4.9 748.14,2302.93 759.78,2291.29 C4.1@759.78,2234 ; C4.1@759.78,2235.83 v1@794.87,2235.83 ; v1(878,2417.55) 878,2414.03 892.72,2399.31 U3.3 ; U3.9 U3.8 932.09,2299.55 933,2298.64 933.98,2298.64 944.13,2288.49 944.13,2245.32 C3.1@952,2237.44 ; C3.1 v1(992.45,2234) ; U6.12 U6.13 1695.02,1418 1707.95,1405.06 R1.2 1713.29,1403.67 1791.89,1403.67 v1(1793.29,1402.27) ; U6.1 v1(1641,1725.09) ; v1(2207.36,2383.22) C7.2@2259.91,2383.22 ; v1(2235.29,2448.24) 2235.29,2482.28 2243.14,2490.13 2267.69,2490.13 C5.2 2272.17,2490.27 2306.86,2490.27 ; v1(2301.65,1232.78) 2339.39,1232.78 C2.1 2348.89,1232.56 2382.12,1232.56 2400.68,1214 2403.22,1214 2405.11,1212.11 U2.6 ; v1@2305.58,2448.43 2306.86,2449.71 2306.86,2490.27 ; C6.2 2306.86,2490.27 ; C6.2@2343.32,2490.68 2398.72,2490.68 U5.3 ; C1.1 v1(2397.56,1398.35) ; U2.3 U2.2 2451.09,1148.33 2451.09,1109.49 v1(2451.29,1109.29)
  Bottom Layer w17.99: v1(330.59,2795) J1.1 346.59,2734 347.58,2733.01 392.13,2733.01 392.27,2732.87 514.54,2732.87 J1.2 v1@529.41,2795 ; J2.4 J2.6 ; J2.10@2919.76,2318.35 v1(3016.76,2318.35) ; J2.4@2923.57,2613.84 v1(3016.76,2613.84) ; v1(3016.76,918) J2.38 J2.36 ; v1(3016.76,1018) J2.36 ; v1(3016.76,1118) J2.34 ; v1(3016.76,1218) J2.32 ; v1(3016.76,1318) J2.30 ; v1(3016.76,1418) J2.28 ; v1(3016.76,1518) J2.26 ; v1(3016.76,1618) J2.24 ; v1(3016.76,1718) J2.22 ; v1(3016.76,1818) J2.20 ; v1(3016.76,1918) J2.18 ; v1(3016.76,2018) J2.16 ; v1(3016.76,2118) J2.14 ; v1(3016.76,2218) J2.12 ; v1(3016.76,2418) J2.8 ; v1(3016.76,2518) J2.6 ; J2.36 J2.34 ; J2.34 J2.32 ; J2.32 J2.30 ; J2.30 J2.28 ; J2.28 J2.26 ; J2.26 J2.24 ; J2.24 J2.22 ; J2.22 J2.20 ; J2.20 J2.18 ; J2.18 J2.16 ; J2.16 J2.14 ; J2.14 J2.12 ; J2.12 J2.10 J2.8 ; J2.8 J2.6
  Bottom Layer w18: v1(230,918) J1.37 J1.35 ; v1(230,1018) J1.35 ; v1(230,1118) J1.33 ; v1(230,1218) J1.31 ; v1(230,1318) J1.29 ; v1(230,1418) J1.27 J1.29 ; v1(230,1718) J1.21 J1.19 ; v1(230,1818) J1.19 ; v1(230,1918) J1.17 ; v1(230,2018) J1.15 ; v1(230,2118) J1.13 ; v1(230,2218) J1.11 J1.13 ; v1(2720.59,2793) J2.1 2736.52,2733.93 2903.48,2733.93 J2.2 ; J2.4 J2.2 ; v1(2919.41,2793) J2.2 ; J1.35 J1.33 ; J1.33 J1.31 ; J1.31 J1.29 ; J1.19 J1.17 ; J1.17 J1.15 ; J1.15 J1.13
  other v1: 2504,995 2167.85,1053.03 2012,1068 2192.18,1074.03 2135.85,1095.97 1420.56,1260.03 1323.56,1261.03 1370.06,1261.03 806.9,1316.61 867.88,1317.02 1322.85,1327.37 1369.35,1327.37 1419.85,1327.37 806.9,1352.82 864.03,1352.82 1321.85,1788.63 1373.85,1788.63 1422.85,1788.63 1318,1855 1370,1855 1419,1855 1060.64,2114.91 998.66,2121.03 1061.85,2147.11 814.63,2155.23 846.76,2155.23 813.72,2208.43 794.87,2234.81 999.57,2277.35 643.1,2281.68 846.76,2288.49 616.35,2291.29 2577.63,2301.85 2557.63,2327.35 2613.65,2347.65 2795,2368.58 2134.04,2394 2635,2404 987.45,2413.69 2196.39,2415 2130.85,2425.97 430,2434.23 987.45,2443.77 2307.02,2448.43 693.44,2462.86 757.42,2463.76 682.46,2530.74 2597.23,2544.19 756.28,2556.69 2572.85,2563.57 622.2,2567.66 430,2580.29 529.52,2794.36
"GPIO PA4": J1.7 U4.7 | length 796.4
  Top Layer w13.78: v2(639.58,2200.2) 643.1,2200.2 658.71,2184.59 824.24,2184.59 843.06,2203.41 843.06,2217.92 v2(844.55,2219.4)
  Bottom Layer w13.78: J1.7 350.67,2418 368.78,2399.89 368.78,2391.85 ; 368.81,2391.82 368.81,2379.05 481.86,2266 573.78,2266 v2(639.58,2200.2) ; U4.7 756.9,2324.2 772.31,2324.2 844.55,2251.95 v2(844.55,2219.4)
"GPIO PA15": J2.37 U2.4 | length 519.4
  Bottom Layer w13.78: U2.4 2411.53,952.47 2446,918 J2.37
"GPIO PB0": J1.10 U4.6 | length 416.3
  Top Layer w13.78: v2(643.81,2314.32) 682.77,2275.37 787.89,2275.37 v2(828.02,2315.5)
  Bottom Layer w10: J1.10 533.09,2314.32 v2(643.81,2314.32)
  Bottom Layer w13.78: U4.6 757.42,2343.36 797.81,2343.36 825.67,2315.5 v2(828.02,2315.5)
"GPIO PB1": J1.12 U3.6 | length 887.7
  Bottom Layer w13.78: J1.12 549.49,2218 569.49,2198 569.49,2192.47 569.82,2192.14 569.82,2178.18 648.14,2099.86 939.32,2099.86 1009.46,2170 1050,2170 1068,2188 1068,2298 1024.13,2341.87 U3.6
"GPIO PB2": J1.9 U3.7 | length 1189.7
  Top Layer w10: v2(1028.85,2266.37) v2@1029.93,2265.3 ; v2@1029.93,2133.07 v2(1031,2132)
  Top Layer w13.78: v2@1029.93,2133.07 v2@1029.93,2265.3
  Bottom Layer w13.78: J1.9 348.36,2300.23 386.77,2300.23 427,2260 427,2115 473,2069 1000.14,2069 1031,2099.86 v2(1031,2132) ; U3.7 945.69,2322.18 945.79,2322.08 995.26,2322.08 1028.85,2288.49 v2(1028.85,2266.37)
"GPIO PB3": J2.21 R4.2 | length 339.2
  Bottom Layer w13.78: R4.2 2637.51,1655 2700.51,1718 J2.21
"GPIO PB4": J2.25 R7.2 | length 313.9
  Bottom Layer w13.78: R7.2 2409.53,1518 J2.25
"GPIO PB5": J2.23 R8.2 | length 325.9
  Bottom Layer w13.78: R8.2 2669.51,1587 2700.51,1618 J2.23
"GPIO PC4": J1.3
"GPIO PC5": J1.5
"GPIO PD14": J1.30
"GPIO PE0": J2.13 R3.2 | length 391.5
  Bottom Layer w13.78: R3.2 2507.51,1925 2700.51,2118 J2.13
"GPIO PE1": J2.11 R9.2 | length 404.8
  Bottom Layer w13.78: R9.2 2475.51,1993 2700.51,2218 J2.11
"GPIO PG15": J2.19 R5.2 | length 354.5
  Bottom Layer w13.78: R5.2 2600.51,1718 2700.51,1818 J2.19
I2C1-SCL: J2.5 U5.7 | length 268.7
  Bottom Layer w13.78: U5.7 2591.39,2444.39 2665,2518 J2.5
I2C1-SDA: J2.3 U5.8 | length 840.6
  Bottom Layer w13.78: U5.8 2482.35,2347.65 2561,2269 2787.22,2269 2836.56,2318.35 2836.56,2567.1 2785.66,2618 J2.3
I2C4-SCL: J1.14
I2C4-SDA: J1.16
NetC7_1: C7.1 U5.2 | length 107.9
  Bottom Layer w13.78: C7.1@2314.58,2394 2321.15,2394 2371.54,2444.39 U5.2
NetR1_1: R1.1 U6.11 | length 229.1
  Bottom Layer w13.78: U6.11 1486.61,1470.12 1705.89,1470.12 R1.1
NetR2_1: R2.1 U6.5 | length 961.3
  Bottom Layer w13.78: U6.5 2120.13,1622.72 2348.47,1851.06 R2.1
NetR3_1: R3.1 U6.4 | length 981.2
  Bottom Layer w13.78: U6.4 2077.2,1648.31 2349.94,1921.06 R3.1
NetR4_1: R4.1 U6.9 | length 918.6
  Bottom Layer w13.78: U6.9 2181.36,1520.36 2310.66,1649.66 2343.13,1649.66 R4.1
NetR5_1: R5.1 U6.8 | length 934.1
  Bottom Layer w13.78: U6.8 2160.95,1545.95 2325.55,1710.55 2341.02,1710.55 R5.1
NetR6_1: R6.1 U6.6 | length 944.2
  Bottom Layer w13.78: U6.6 2161.54,1597.13 2348.47,1784.06 R6.1
NetR7_1: R7.1 U6.14 | length 930.1
  Bottom Layer w13.78: U6.14 1487.64,1390.44 1507.82,1390.44 1525.3,1372.96 2120.96,1372.96 2264,1516 R7.1
NetR8_1: R8.1 U6.10 | length 901
  Bottom Layer w13.78: U6.10 2208.03,1494.77 2300.26,1587 R8.1
NetR9_1: R9.1 U6.3 | length 998.8
  Bottom Layer w13.78: U6.3 2034.79,1673.91 2349.94,1989.06 R9.1
OUT1: D1.1 J7.1 U6.27 U6.28 | length 241
  Top Layer w39.37: D1.1 1153.6,2945.07 J7.1@1153.6,3185
  other v2: 1110.26,1749.69 1177,1749.69
OUT2: D5.1 J6.1 U6.25 U6.26 | length 220.5
  Top Layer w39.37: J6.1 2194,2966.88 D5.1
  other v2: 1177,1661.29 1110.26,1662.12
OUT3: D4.1 J4.1 U6.17 U6.18 | length 278.4
  Top Layer w10: J4.1 J4.1@2312.99,352.99
  Top Layer w39.37: J4.1@2312.99,352.99 D4.1
  other v2: 1177,1456.48 1110.26,1457.2
OUT4: D6.1 J5.1 U6.15 U6.16 | length 258.3
  Top Layer w10: D6.1 D6.1@1342,609.35
  Top Layer w39.37: J5.1 D6.1@1342,609.35
  other v2: 1110.26,1367.8 1177,1368.06
QSPI-CLK: J1.18
QSPI_BK1_IO0: J1.22
QSPI_BK1_IO2: J1.20
QSPI_BK1_IO3: J1.28
QSPI_BK2_IO0: J1.32
QSPI_BK2_IO1: J1.34
QSPI_BK2_IO2: J1.36
QSPI_BK2_IO3: J1.38
SPI2-MISO: J1.6 U3.5 U4.5 | length 888
  Top Layer w13.78: v2(756.51,2414.03) 752.99,2414.03 737.02,2430 668.96,2430 636.11,2462.86 v2(636.11,2537.31) 680,2581.2 843.8,2581.2 959.65,2465.35 v2(959.65,2431.2)
  Bottom Layer w13.78: J1.6 547.03,2535.62 634.41,2535.62 v2(636.11,2537.31) ; U4.5 745.61,2366.83 745.61,2367.81 759.75,2381.95 759.75,2407.28 756.51,2410.51 v2(756.51,2414.03) ; U3.5@932.09,2364.51 933,2365.41 933.98,2365.41 959.65,2391.08 v2(959.65,2431.2)
SPI2-MOSI: J1.4 U3.4 U4.4 | length 722.7
  Top Layer w13.78: v2(725.02,2463.76) v2(725.02,2544.49)
  Bottom Layer w13.78: J1.4 542,2618 559.51,2600.49 669.02,2600.49 v2(725.02,2544.49) 743.51,2526 845,2526 912.41,2458.59 U3.4 ; U4.4 v2(725.02,2463.76)
SPI2-SCK: J1.8 U3.2 U4.2 | length 680.1
  Bottom Layer w13.78: J1.8 J1.8@549.49,2418 ; U4.2 613.59,2344.27 567.6,2390.26 567.6,2399.89 J1.8@549.49,2418 ; U3.2 851.67,2341.87 810.42,2383.12 810.42,2453.06 767.48,2496 608.27,2496 565.72,2453.44 565.72,2434.23 J1.8@549.49,2418
SPI6-MISO: J2.35 U2.1 | length 306.7
  Bottom Layer w13.78: U2.1 2470.58,1144.1 2471.25,1144.1 2597.35,1018 J2.35
SPI6-MOSI: J2.31 U2.13 | length 268.5
  Bottom Layer w13.78: U2.13 2568.2,1194.32 2610.12,1236.23 2674.33,1236.23 2674.45,1236.11 2702.48,1236.11 J2.31
SPI6-SCK: J2.33 U2.14 | length 266.9
  Bottom Layer w13.78: U2.14@2477.14,1174.63 2485.47,1174.63 2485.6,1174.49 2565.86,1174.49 2604.43,1135.92 2702.67,1135.92 J2.33
UART4-RX: J2.17 R6.2 | length 366.9
  Bottom Layer w13.78: R6.2 2570.51,1788 2700.51,1918 J2.17
UART4-TX: J2.15 R2.2 | length 380.6
  Bottom Layer w13.78: R2.2 2537.51,1855 2700.51,2018 J2.15
UART5-RX: J2.27 U2.9 | length 410.6
  Bottom Layer w13.78: U2.9 2431.21,1321.21 2528,1418 J2.27
UART5-TX: J2.29 U2.12 | length 286.7
  Bottom Layer w13.78: U2.12 2517.79,1214 2621.79,1318 J2.29
USART2-RX: J2.7 U5.6 | length 528.2
  Bottom Layer w13.78: U5.6 2588.61,2493.61 2667,2572 2772,2572 2795,2549 2795,2473.41 2760.67,2439.08 2760.67,2438 2740.67,2418 J2.7
USART2-TX: J2.9 U5.5 | length 436.5
  Top Layer w13.78: v2(2569,2530.36) 2569,2527 2578,2518 2578,2343.56 2588.61,2332.96 v2(2588.61,2331.2)
  Bottom Layer w13.78: U5.5 2556.54,2542.82 v2(2569,2530.36) ; v2(2588.61,2331.2) 2592.12,2331.2 2605.33,2318 J2.9
pads on no net: J1.41 J1.42 J2.41 J2.42 J4.3 J4.4 J5.3 J5.4 J6.3 J6.4 J7.3 J7.4 U2.10 U2.11 U6.2 U6.7 U6.19 U6.24

## Polygon pours and split planes (outlines as drawn)
OUT1 on PWR Layer "12V1" (solid, pour order 23): 0,3470 cw(c70,3470) 70,3540 330,3540 495,3375 1767,3375 1767,1642 165,1642 165,3045 0,3210
OUT2 on PWR Layer "OUT4" (solid, pour order 33): 1777,3375 3055,3375 3220,3540 3481,3540 cw(c3481,3471.01) 3550,3471 3550,3210 3385,3045 3385,1701.44 1777,1691.25
OUT3 on PWR Layer "OUT3" (solid, pour order 30): 1777,1642 3385,1642 3385,495 3550,330 3550,70 cw(c3480.01,69.99) 3480,0 3220,0 3055,165 1777,165
OUT2 on PWR Layer "NONET_L03_P022" (solid, pour order 22): 928.83,1698.91 928.83,1567 3368.8,1567 3368.8,1709.09
OUT4 on PWR Layer "OUT2" (solid, pour order 25): 165,1434 1767,1434 1767,165 495,165 330,0 70,0 cw(c69.99,69.99) 0,70 0,330 165,495
OUT4 on PWR Layer "NONET_L03_P038" (solid, pour order 38): 919.85,1434 919.85,1567.48 920.35,1567.99 173.03,1567.99 173.03,1434
OUT1 on PWR Layer "NONET_L03_P037" (solid, pour order 37): 928.83,1568.53 928.28,1567.99 173.03,1567.99 173.03,1633.97 165,1642 920.8,1642
OUT3 on PWR Layer "NONET_L03_P019" (solid, pour order 19): 1804,1560.5 927,1560.5 927,1437.47 1804,1437.47
GND on Bottom Layer "GND_L04_P051" (solid, remove dead copper, pour order 51): 0,3470 cw(c70,3470) 70,3540 330,3540 495,3375 3045,3375 3210,3540 3471,3540 cw(c3471,3471) 3540,3471 3540,3210 3375,3045 3375,495 3540,330 3540,70 cw(c3470,70) 3470,0 3210,0 3045,165 495,165 330,0 70,0 cw(c70,70) 0,70 0,330 165,495 165,3045 0,3210
OUT1 on Bottom Layer "OUT1_L04_P049" (solid, pour order 49): 1283.39,1771.27 1283.55,1771.1 1283.55,1728.28 1095,1728.28 1095,1771.63
OUT4 on Bottom Layer "OUT4_L04_P048" (solid, pour order 48): 1283.55,1389.38 1283.72,1389.21 1283.72,1346.39 1095.17,1346.39 1095.17,1389.74
OUT3 on Bottom Layer "OUT3_L04_P047" (solid, pour order 47): 1283.63,1477.86 1283.63,1434.73 1095.08,1434.73 1095.08,1478.22
OUT2 on Bottom Layer "OUT2_L04_P046" (solid, pour order 46): 1283.39,1682.61 1283.55,1682.44 1283.55,1639.62 1095,1639.62 1095,1682.97
12V1 on Bottom Layer "NONET_L04_P034" (solid, pour order 34): 285,1482 575,1482 575,1643 574.97,1642.97 285,1642.97
OUT4 on Bottom Layer "OUT4_L04_P044" (solid, pour order 44): 1283.33,1426.61 1283.72,1426.22 1283.72,1379.79 1225.33,1379.79 1225.33,1426.61
OUT3 on Bottom Layer "OUT3_L04_P043" (solid, pour order 43): 1283.33,1480.61 1283.72,1480.22 1283.72,1433.79 1225.33,1433.79 1225.33,1480.61
OUT2 on Bottom Layer "OUT2_L04_P042" (solid, pour order 42): 1283.33,1685.72 1283.72,1685.33 1283.72,1638.9 1225.33,1638.9 1225.33,1685.72
OUT1 on Bottom Layer "OUT1_L04_P041" (solid, pour order 41): 1283,1737 1283.39,1736.61 1283.39,1690.19 1225,1690.19 1225,1737
12V1 on Bottom Layer "12V1_L04_P039" (solid, pour order 39): 1283.39,1604.77 1283.39,1512 562,1512 562,1605.77
GND on Bottom Layer "GND_L04_P040" (solid, pour order 40): 1297.16,1886 1442.83,1886 1442.83,1244.17 1442.83,1226 1297.28,1226
GND on GND Layer "GND" (solid, pour order 3): -0.11,3469.67 cw(c69.89,3469.67) 69.89,3539.67 329.89,3539.67 494.89,3374.67 3044.89,3374.67 3209.89,3539.67 3470.89,3539.67 cw(c3470.89,3470.67) 3539.89,3470.67 3539.89,3209.67 3374.89,3044.67 3374.89,494.67 3539.89,329.67 3539.89,69.67 cw(c3469.89,69.67) 3469.89,-0.33 3209.89,-0.33 3044.89,164.67 494.89,164.67 329.89,-0.33 69.89,-0.33 cw(c69.89,69.67) -0.11,69.67 -0.11,329.67 164.89,494.67 164.89,3044.67 -0.11,3209.67
GND on Top Layer "GND_L01_P052" (solid, remove dead copper, pour order 52): 0,3470 cw(c70,3470) 70,3540 330,3540 495,3375 3045,3375 3210,3540 3471,3540 cw(c3471,3471) 3540,3471 3540,3210 3375,3045 3375,495 3540,330 3540,70 cw(c3470,70) 3470,0 3210,0 3045,165 495,165 330,0 70,0 cw(c70,70) 0,70 0,330 165,495 165,3045 0,3210

## Keep-outs
Keep-Out Layer:
  circle w10: c200,200 r88.19
  circle w10: c3340,200 r88.19
  circle w10: c3340,3340 r88.19
  circle w10: c200,3340 r88.19

## Silkscreen, mask and mechanical layers (free items; w line width, h text height)
Top Overlay:
  drawing of 5 lines, arcs and shapes, not listed
  text "D1" at 1389,2913 h60
Board Outline:
  the board outline again, w4